# Altium PCB IPG_Rigid.PcbDoc (part 6 of 13)
Units mm, origin at the board's own origin, x right, y up, seen from the top; angles counter-clockwise.
Board outline 69.6 x 90.73 mm, 10 copper layers (TOP, DHOR, DVERT, GND 1, POWER, GND 2, GND 3, AVERT, AHOR, BOT), stack 1.198 mm thick; 745 components, 398 nets, 1997 pads, 2678 vias.
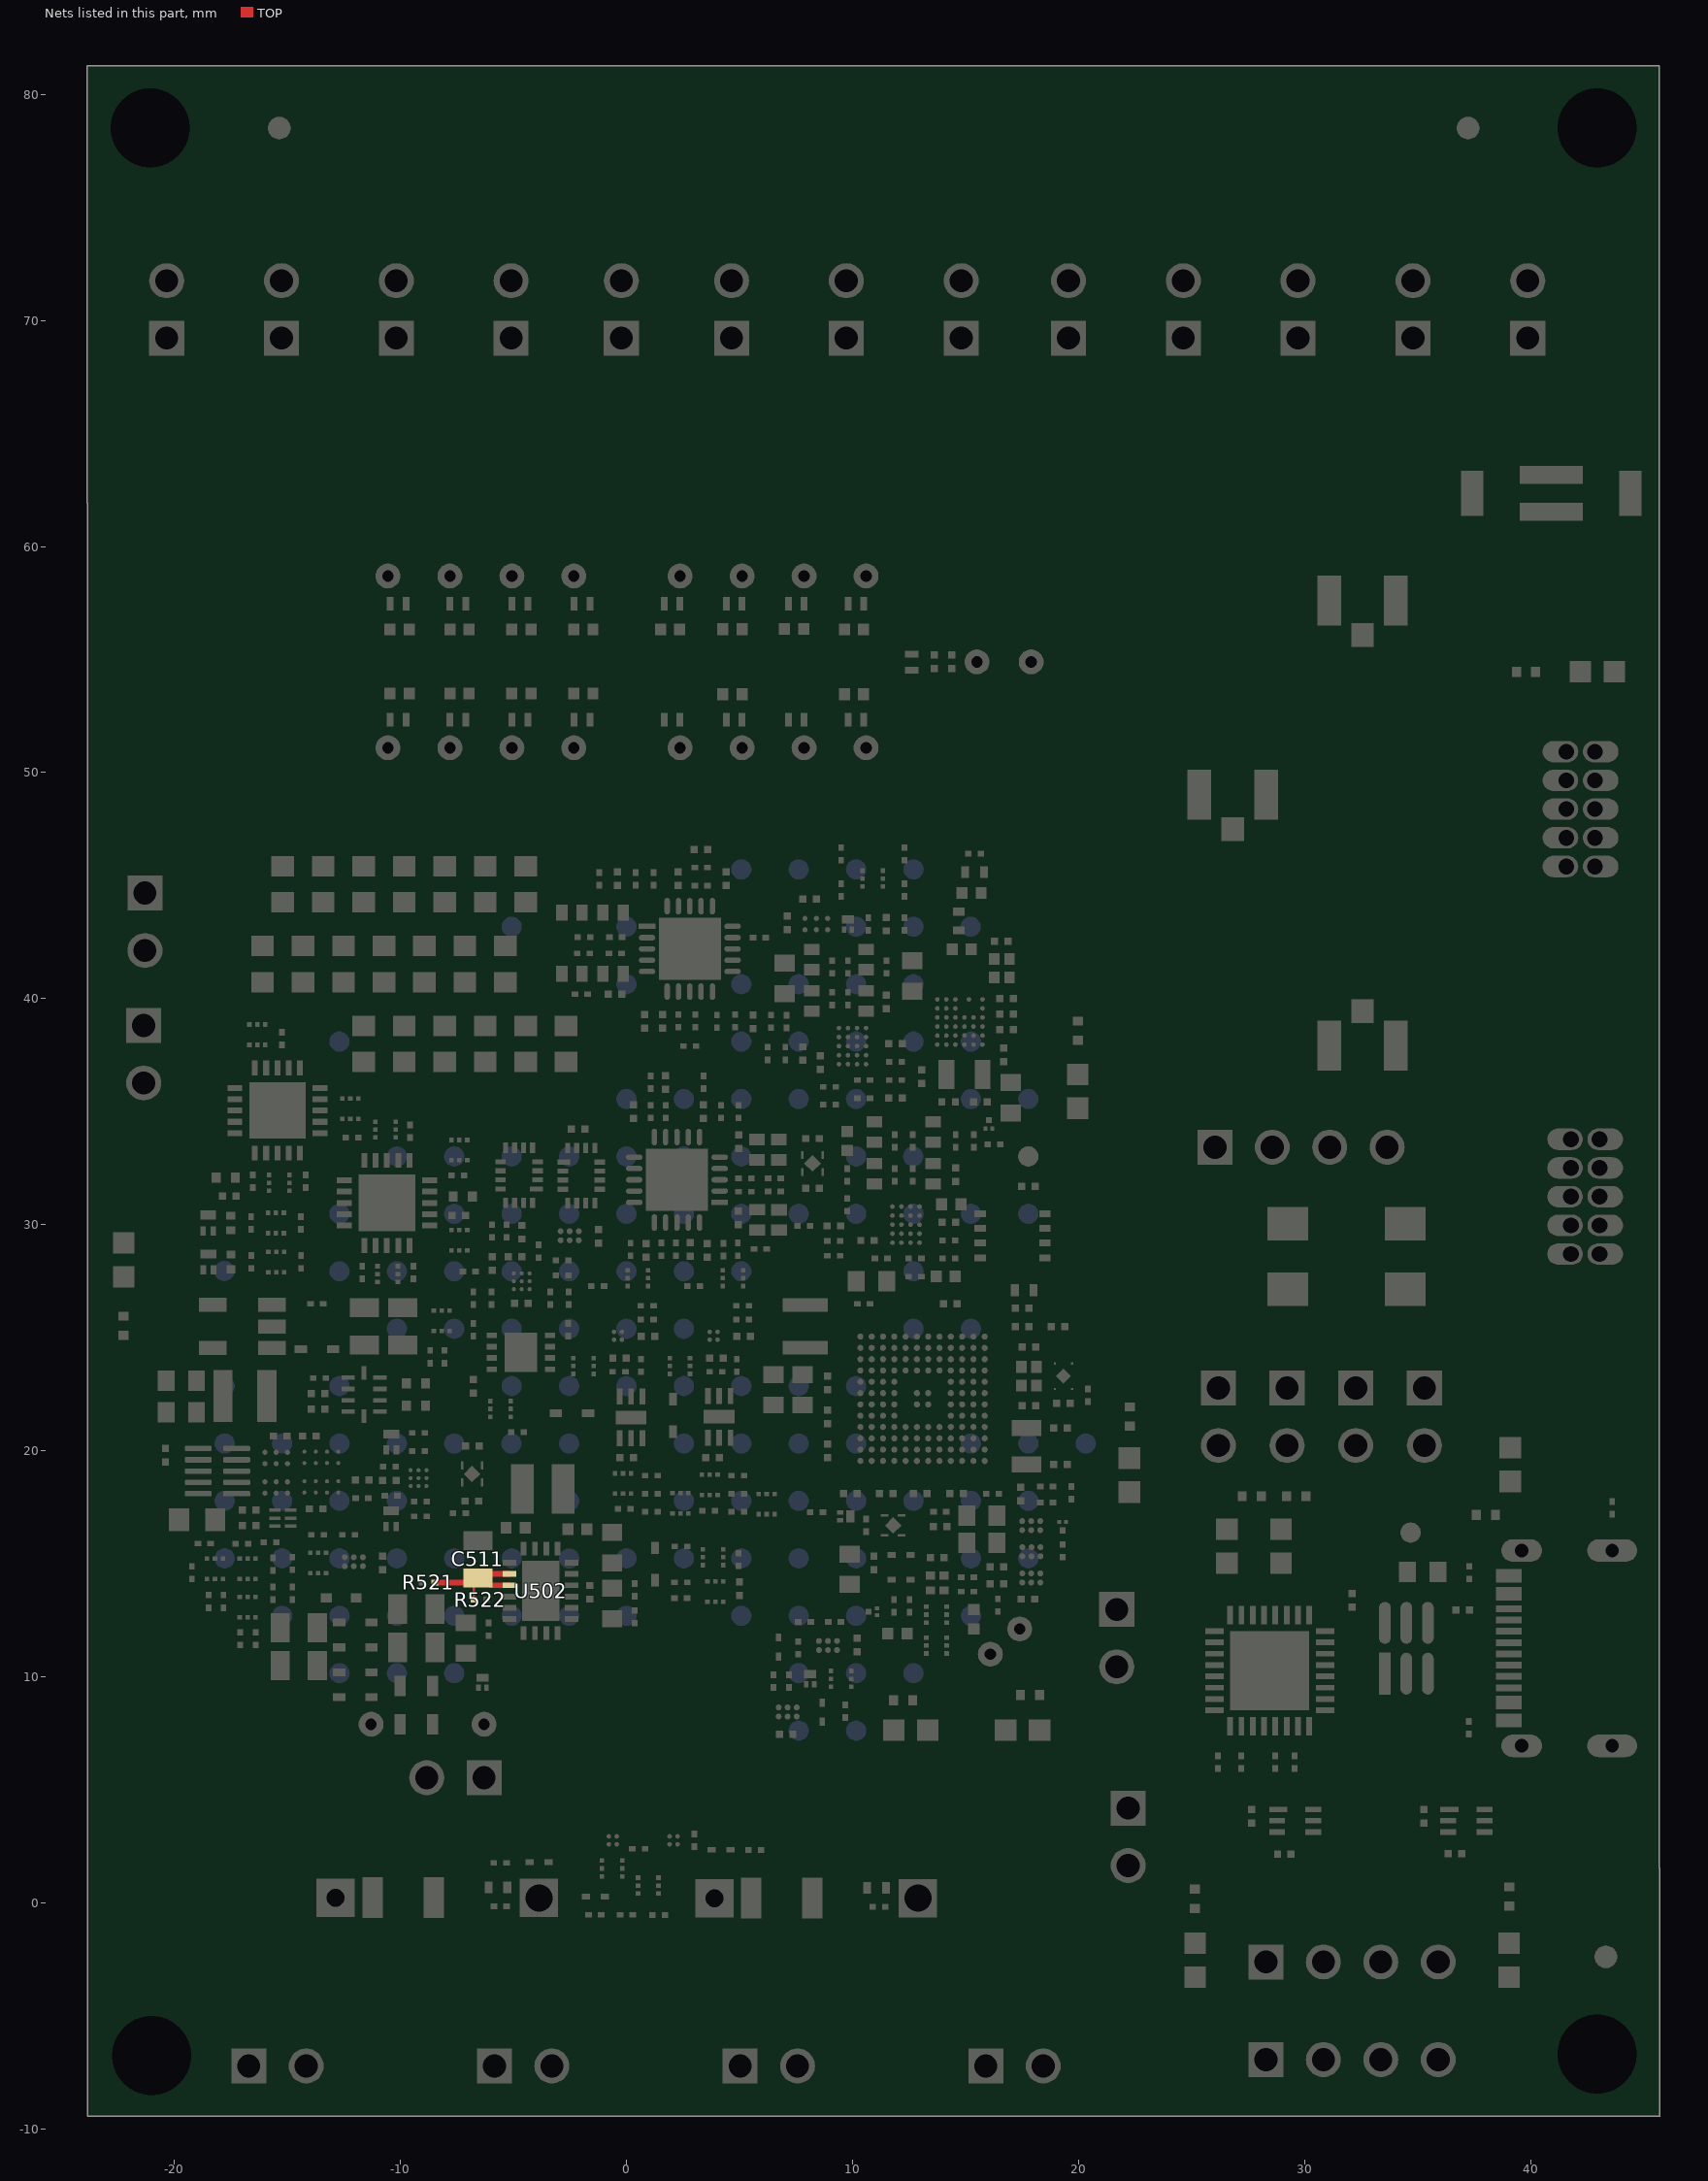
[diagram p11: the nets of this part, all layers, seen from the top]

## Part data (continued)
R913: "Fixed Resistor, Metal Glaze/thick Film, 0.05W, 120000ohm, 30V, 1% +/-Tol, 200ppm/Cel, Surface Mount, 0201", Case/Package=0201, Manufacturer="Vishay Dale", Max Operating Temperature=155°C, Medical Grade MFR=TBD, Min Operating Temperature=-55°C, Package Shape=Rectangular, Power=50mW, Rated Temperature=70°C, Resistor Type="FIXED RESISTOR", Supplier Part Number 1=541-CRCW0201120KFNEDDKR-ND, Temperature Coefficient=200ppm/°C, Tolerance=1%, Working Voltage=30V, Category="Chip SMD Resistors", ComponentLink1Description=https://datasheet.ciiva.com:443/pdfs/VipMasterIC/IC/VISH/VISH-S-A0002932828/VISH-S-A0002932828-1.pdf?src-supplier=IHS+Markit, ComponentLink1URL=https://datasheet.ciiva.com:443/pdfs/VipMasterIC/IC/VISH/VISH-S-A0002932828/VISH-S-A0002932828-1.pdf?src-supplier=IHS+Markit, ComponentLink2Description=https://datasheet.ciiva.com/7800/1719906-7800943.pdf?src-supplier=Element14, ComponentLink2URL=https://datasheet.ciiva.com/7800/1719906-7800943.pdf?src-supplier=Element14, ComponentLink3Description=https://datasheet.ciiva.com/22682/1700795-22682622.pdf?src-supplier=Element14, ComponentLink3URL=https://datasheet.ciiva.com/22682/1700795-22682622.pdf?src-supplier=Element14, ComponentLink4Description=https://datasheet.ciiva.com/22702/1719906-22702669.pdf?src-supplier=Element14, ComponentLink4URL=https://datasheet.ciiva.com/22702/1719906-22702669.pdf?src-supplier=Element14, ComponentLink5Description=https://datasheet.ciiva.com/29926/crcw0201e3-29926006.pdf?src-supplier=Avnet, ComponentLink5URL=https://datasheet.ciiva.com/29926/crcw0201e3-29926006.pdf?src-supplier=Avnet, Manufacturer Part Number=CRCW0201120KFNED, Medical Grade MFR PN=TBD, Mounting Technology="Surface Mount", Pins=2, Reach SVHC Compliant=Yes, RoHS=Yes, RoHS Compliant=Yes, Supplier 1=Digikey, Technology="METAL GLAZE/THICK FILM", Terminal Finish=Nickel, Termination=Wraparound
R1001 R1026 R1033 R1057: "Fixed Resistor, Metal Glaze/thick Film, 0.05W, 150000ohm, 30V, 1% +/-Tol, 200ppm/Cel, Surface Mount, 0201", Case/Package=0201, Manufacturer=Vishay, Max Operating Temperature=155°C, Medical Grade MFR=Mini-Systems, Medical Grade MFR PN=MWA96SM-1503F-NS62TR, Min Operating Temperature=-55°C, Package Height=0.23mm, Package Length=0.6mm, Package Shape=Rectangular, Package Style=SMTMeter, Package Width=0.3mm, Power=50mW, Rated Temperature=70°C, Resistor Type="FIXED RESISTOR", Supplier Part Number=541-CRCW0201150KFNEDCT-ND, Supplier Part Number 1=541-CRCW0201150KFNEDDKR-ND, Temperature Coefficient=200ppm/°C, Tolerance=1%, Working Voltage=30V, Category="Chip SMD Resistors", ComponentLink1Description=https://datasheet.ciiva.com:443/pdfs/VipMasterIC/IC/VISH/VISH-S-A0002932828/VISH-S-A0002932828-1.pdf?src-supplier=IHS+Markit, ComponentLink1URL=https://datasheet.ciiva.com:443/pdfs/VipMasterIC/IC/VISH/VISH-S-A0002932828/VISH-S-A0002932828-1.pdf?src-supplier=IHS+Markit, ComponentLink2Description=https://datasheet.ciiva.com/7673/1719906-7673181.pdf?src-supplier=Element14, ComponentLink2URL=https://datasheet.ciiva.com/7673/1719906-7673181.pdf?src-supplier=Element14, ComponentLink3Description=https://datasheet.ciiva.com/7673/1719906-7673182.pdf?src-supplier=Element14, ComponentLink3URL=https://datasheet.ciiva.com/7673/1719906-7673182.pdf?src-supplier=Element14, ComponentLink4Description=https://datasheet.ciiva.com/2577/crcw0201e3-2577323.pdf?src-supplier=Digikey, ComponentLink4URL=https://datasheet.ciiva.com/2577/crcw0201e3-2577323.pdf?src-supplier=Digikey, ComponentLink5Description=https://datasheet.ciiva.com/8968/crcw0201e3-8968685.pdf?src-supplier=Avnet, ComponentLink5URL=https://datasheet.ciiva.com/8968/crcw0201e3-8968685.pdf?src-supplier=Avnet, ComponentLink6Description=https://datasheet.ciiva.com/22692/1719906-22692733.pdf?src-supplier=Element14, ComponentLink6URL=https://datasheet.ciiva.com/22692/1719906-22692733.pdf?src-supplier=Element14, Construction=Chip, JESD-609 Code=e3, Manufacturer Part Number=CRCW0201150KFNED, Mounting Technology="Surface Mount", Packaging="Tape and Reel", Pins=2, Pricing="1=0,1, 10=0,037, 50=0,0242, 100=0,0204, 500=0,01426, 1000=0,01241, 5000=0,00924 (USD)", Reach SVHC Compliant=Yes, Reference Standard=AEC-Q200, RoHS=Yes, RoHS Compliant=Yes, Stock=35009, Supplier=Digikey, Supplier 1=Digikey, Technology="METAL GLAZE/THICK FILM", Terminal Finish=Nickel, Termination=Wraparound
R1005 R1006 R1036: "Fixed Resistor, Metal Glaze/thick Film, 0.05W, 1400000ohm, 30V, 1% +/-Tol, 200ppm/Cel, Surface Mount, 0201", Case/Package=0201, Manufacturer="Vishay Draloric", Max Operating Temperature=155°C, Medical Grade MFR=Mini-Systems, Medical Grade MFR PN=MWA96SM-1404F-NS62TR, Min Operating Temperature=-55°C, Package Shape=Rectangular, Power=50mW, Rated Temperature=70°C, Resistor Type="FIXED RESISTOR", Supplier Part Number=541-CRCW02011M40FNEDCT-ND, Temperature Coefficient=200ppm/°C, Tolerance=1%, Working Voltage=30V, Category="Chip SMD Resistors", ComponentLink1Description=https://datasheet.ciiva.com:443/pdfs/VipMasterIC/IC/VISH/VISH-S-A0002932828/VISH-S-A0002932828-1.pdf?src-supplier=IHS+Markit, ComponentLink1URL=https://datasheet.ciiva.com:443/pdfs/VipMasterIC/IC/VISH/VISH-S-A0002932828/VISH-S-A0002932828-1.pdf?src-supplier=IHS+Markit, ComponentLink2Description=http://www.farnell.com/datasheets/2111203.pdf?src-supplier=Farnell, ComponentLink2URL=http://www.farnell.com/datasheets/2111203.pdf?src-supplier=Farnell, ComponentLink3Description=http://www.farnell.com/datasheets/2238160.pdf?src-supplier=Farnell, ComponentLink3URL=http://www.farnell.com/datasheets/2238160.pdf?src-supplier=Farnell, ComponentLink4Description=http://www.farnell.com/datasheets/2111203.pdf?src-supplier=Element14, ComponentLink4URL=http://www.farnell.com/datasheets/2111203.pdf?src-supplier=Element14, ComponentLink5Description=http://www.farnell.com/datasheets/2045973.pdf?src-supplier=Element14, ComponentLink5URL=http://www.farnell.com/datasheets/2045973.pdf?src-supplier=Element14, ComponentLink6Description=http://www.farnell.com/datasheets/1719906.pdf?src-supplier=Element14, ComponentLink6URL=http://www.farnell.com/datasheets/1719906.pdf?src-supplier=Element14, ComponentLink7Description=http://www.vishay.com/docs/20052/crcw0201e3.pdf?src-supplier=Digikey, ComponentLink7URL=http://www.vishay.com/docs/20052/crcw0201e3.pdf?src-supplier=Digikey, JESD-609 Code=e3, Manufacturer Part Number=CRCW02011M40FNED, Mounting Technology="Surface Mount", Packaging="Tape and Reel", Pins=2, Pricing="1=0,1, 10=0,037, 50=0,0242, 100=0,0204, 500=0,01426, 1000=0,01241, 5000=0,00924 (USD)", Reach SVHC Compliant=Yes, RoHS=Yes, RoHS Compliant=Yes, Stock=24065, Supplier=Digikey, Supplier 1=Digikey, Supplier Part Number 1=541-CRCW02011M40FNEDCT-ND, Technology="METAL GLAZE/THICK FILM", Terminal Finish=Nickel, Termination=Wraparound
R1011 R1012 R1015 R1018 R1042 R1043 R1046 R1047: "Fixed Resistor, Metal Glaze/thick Film, 0.05W, 180000ohm, 30V, 1% +/-Tol, 200ppm/Cel, Surface Mount, 0201", Case/Package=0201, Manufacturer=Vishay, Max Operating Temperature=155°C, Medical Grade MFR=Mini-Systems, Medical Grade MFR PN=MWA96SM-1803F-NS62TR, Min Operating Temperature=-55°C, Package Height=0.23mm, Package Length=0.6mm, Package Shape=Rectangular, Package Style=SMTMeter, Package Width=0.3mm, Power=50mW, Rated Temperature=70°C, Resistor Type="FIXED RESISTOR", Supplier Part Number=541-CRCW0201180KFNEDCT-ND, Temperature Coefficient=200ppm/°C, Tolerance=1%, Working Voltage=30V, Category="Chip SMD Resistors", ComponentLink1Description=https://datasheet.ciiva.com:443/pdfs/VipMasterIC/IC/VISH/VISH-S-A0002932828/VISH-S-A0002932828-1.pdf?src-supplier=IHS+Markit, ComponentLink1URL=https://datasheet.ciiva.com:443/pdfs/VipMasterIC/IC/VISH/VISH-S-A0002932828/VISH-S-A0002932828-1.pdf?src-supplier=IHS+Markit, ComponentLink2Description=https://datasheet.ciiva.com/7714/1719906-7714127.pdf?src-supplier=Element14, ComponentLink2URL=https://datasheet.ciiva.com/7714/1719906-7714127.pdf?src-supplier=Element14, ComponentLink3Description=https://datasheet.ciiva.com/22665/1700795-22665798.pdf?src-supplier=Element14, ComponentLink3URL=https://datasheet.ciiva.com/22665/1700795-22665798.pdf?src-supplier=Element14, ComponentLink4Description=https://datasheet.ciiva.com/22692/1719906-22692745.pdf?src-supplier=Element14, ComponentLink4URL=https://datasheet.ciiva.com/22692/1719906-22692745.pdf?src-supplier=Element14, Construction=Chip, JESD-609 Code=e3, Manufacturer Part Number=CRCW0201180KFNED, Mounting Technology="Surface Mount", Packaging="Tape and Reel", Pins=2, Pricing="1=0,1, 10=0,037, 50=0,0242, 100=0,0204, 500=0,01426, 1000=0,01241, 5000=0,00924 (USD)", Reach SVHC Compliant=Yes, Reference Standard=AEC-Q200, RoHS=Yes, RoHS Compliant=Yes, Stock=52185, Supplier=Digikey, Supplier 1=Digikey, Supplier Part Number 1=541-CRCW0201180KFNEDCT-ND, Technology="METAL GLAZE/THICK FILM", Terminal Finish=Nickel, Termination=Wraparound
R1021 R1022 R1052 R1053: "Fixed Resistor, Metal Glaze/thick Film, 0.05W, 360000ohm, 30V, 1% +/-Tol, 200ppm/Cel, Surface Mount, 0201", Case/Package=0201, Manufacturer=Vishay, Max Operating Temperature=155°C, Medical Grade MFR=TBD, Min Operating Temperature=-55°C, Package Height=0.23mm, Package Length=0.6mm, Package Shape=Rectangular, Package Style=SMTMeter, Package Width=0.3mm, Power=50mW, Rated Temperature=70°C, Resistor Type="FIXED RESISTOR", Supplier Part Number=541-CRCW0201360KFNEDCT-ND, Temperature Coefficient=200ppm/°C, Tolerance=1%, Working Voltage=30V, Category="Chip SMD Resistors", ComponentLink1Description=https://datasheet.ciiva.com:443/pdfs/VipMasterIC/IC/VISH/VISH-S-A0002932828/VISH-S-A0002932828-1.pdf?src-supplier=IHS+Markit, ComponentLink1URL=https://datasheet.ciiva.com:443/pdfs/VipMasterIC/IC/VISH/VISH-S-A0002932828/VISH-S-A0002932828-1.pdf?src-supplier=IHS+Markit, ComponentLink2Description=https://datasheet.ciiva.com/2577/crcw0201e3-2577346.pdf?src-supplier=Digikey, ComponentLink2URL=https://datasheet.ciiva.com/2577/crcw0201e3-2577346.pdf?src-supplier=Digikey, ComponentLink3Description=https://datasheet.ciiva.com/8943/crcw0201e3-8943180.pdf?src-supplier=Avnet, ComponentLink3URL=https://datasheet.ciiva.com/8943/crcw0201e3-8943180.pdf?src-supplier=Avnet, ComponentLink4Description=https://datasheet.ciiva.com/22674/1700795-22674747.pdf?src-supplier=Element14, ComponentLink4URL=https://datasheet.ciiva.com/22674/1700795-22674747.pdf?src-supplier=Element14, ComponentLink5Description=https://datasheet.ciiva.com/22706/1719906-22706189.pdf?src-supplier=Element14, ComponentLink5URL=https://datasheet.ciiva.com/22706/1719906-22706189.pdf?src-supplier=Element14, ComponentLink6Description=https://datasheet.ciiva.com/7673/1719906-7673964.pdf?src-supplier=Element14, ComponentLink6URL=https://datasheet.ciiva.com/7673/1719906-7673964.pdf?src-supplier=Element14, ComponentLink7Description=https://datasheet.ciiva.com/7673/1719906-7673965.pdf?src-supplier=Element14, ComponentLink7URL=https://datasheet.ciiva.com/7673/1719906-7673965.pdf?src-supplier=Element14, Construction=Chip, JESD-609 Code=e3, Manufacturer Part Number=CRCW0201360KFNED, Medical Grade MFR PN=TBD, Mounting Technology="Surface Mount", Packaging="Tape and Reel", Pins=2, Pricing="1=0,1, 10=0,037, 50=0,0242, 100=0,0204, 500=0,01426, 1000=0,01241, 5000=0,00924 (USD)", Reach SVHC Compliant=Yes, Reference Standard=AEC-Q200, RoHS=Yes, RoHS Compliant=Yes, Stock=14607, Supplier=Digikey, Supplier 1=Digikey, Supplier Part Number 1=541-CRCW0201360KFNEDCT-ND, Technology="METAL GLAZE/THICK FILM", Terminal Finish=Nickel, Termination=Wraparound
R1023: "Fixed Resistor, Metal Glaze/thick Film, 0.05W, 2200000ohm, 30V, 1% +/-Tol, 200ppm/Cel, Surface Mount, 0201", Case/Package=0201, Manufacturer="Vishay Draloric", Max Operating Temperature=155°C, Medical Grade MFR=TBD, Min Operating Temperature=-55°C, Package Shape=Rectangular, Power=50mW, Rated Temperature=70°C, Resistor Type="FIXED RESISTOR", Supplier Part Number=541-CRCW02012M20FNEDCT-ND, Temperature Coefficient=200ppm/°C, Tolerance=1%, Working Voltage=30V, Category="Chip SMD Resistors", ComponentLink1Description=https://datasheet.ciiva.com:443/pdfs/VipMasterIC/IC/VISH/VISH-S-A0002932828/VISH-S-A0002932828-1.pdf?src-supplier=IHS+Markit, ComponentLink1URL=https://datasheet.ciiva.com:443/pdfs/VipMasterIC/IC/VISH/VISH-S-A0002932828/VISH-S-A0002932828-1.pdf?src-supplier=IHS+Markit, ComponentLink2Description=https://datasheet.ciiva.com/7800/1719906-7800943.pdf?src-supplier=Element14, ComponentLink2URL=https://datasheet.ciiva.com/7800/1719906-7800943.pdf?src-supplier=Element14, ComponentLink3Description=https://datasheet.ciiva.com/22682/1700795-22682622.pdf?src-supplier=Element14, ComponentLink3URL=https://datasheet.ciiva.com/22682/1700795-22682622.pdf?src-supplier=Element14, ComponentLink4Description=https://datasheet.ciiva.com/22702/1719906-22702669.pdf?src-supplier=Element14, ComponentLink4URL=https://datasheet.ciiva.com/22702/1719906-22702669.pdf?src-supplier=Element14, ComponentLink5Description=https://datasheet.ciiva.com/29926/crcw0201e3-29926006.pdf?src-supplier=Avnet, ComponentLink5URL=https://datasheet.ciiva.com/29926/crcw0201e3-29926006.pdf?src-supplier=Avnet, JESD-609 Code=e3, Manufacturer Part Number=CRCW02012M20FNED, Medical Grade MFR PN=TBD, Mounting Technology="Surface Mount", Packaging="Tape and Reel", Pins=2, Pricing="1=0,1, 10=0,037, 50=0,0242, 100=0,0204, 500=0,01426, 1000=0,01241, 5000=0,00924 (USD)", Reach SVHC Compliant=Yes, RoHS=Yes, RoHS Compliant=Yes, Stock=17414, Supplier=Digikey, Supplier 1=Digikey, Supplier Part Number 1=541-CRCW02012M20FNEDCT-ND, Technology="METAL GLAZE/THICK FILM", Terminal Finish=Nickel, Termination=Wraparound
R1029 R1060: "Fixed Resistor, Metal Glaze/thick Film, 0.05W, 249000ohm, 30V, 1% +/-Tol, 200ppm/Cel, Surface Mount, 0201", Case/Package=0201, Manufacturer=Vishay, Max Operating Temperature=155°C, Medical Grade MFR=Mini-Systems, Medical Grade MFR PN=MWA96SM-2493F-NS62TR, Min Operating Temperature=-55°C, Package Height=0.23mm, Package Length=0.6mm, Package Shape=Rectangular, Package Style=SMTMeter, Package Width=0.3mm, Power=50mW, Rated Temperature=70°C, Resistor Type="FIXED RESISTOR", Supplier Part Number=541-CRCW0201249KFNEDCT-ND, Temperature Coefficient=200ppm/°C, Tolerance=1%, Working Voltage=30V, Category="Chip SMD Resistors", ComponentLink1Description=https://datasheet.ciiva.com:443/pdfs/VipMasterIC/IC/VISH/VISH-S-A0002932828/VISH-S-A0002932828-1.pdf?src-supplier=IHS+Markit, ComponentLink1URL=https://datasheet.ciiva.com:443/pdfs/VipMasterIC/IC/VISH/VISH-S-A0002932828/VISH-S-A0002932828-1.pdf?src-supplier=IHS+Markit, ComponentLink2Description=https://datasheet.ciiva.com/8953/crcw0201e3-8953881.pdf?src-supplier=Avnet, ComponentLink2URL=https://datasheet.ciiva.com/8953/crcw0201e3-8953881.pdf?src-supplier=Avnet, Construction=Chip, JESD-609 Code=e3, Manufacturer Part Number=CRCW0201249KFNED, Mounting Technology="Surface Mount", Packaging="Tape and Reel", Pins=2, Pricing="1=0,1, 10=0,037, 50=0,0242, 100=0,0204, 500=0,01426, 1000=0,01241, 5000=0,00924 (USD)", Reach SVHC Compliant=Yes, Reference Standard=AEC-Q200, RoHS=Yes, RoHS Compliant=Yes, Stock=82297, Supplier=Digikey, Supplier 1=Digikey, Supplier Part Number 1=541-CRCW0201249KFNEDCT-ND, Technology="METAL GLAZE/THICK FILM", Terminal Finish=Nickel, Termination=Wraparound
R1030 R1061: "Fixed Resistor, Metal Glaze/thick Film, 0.05W, 910000ohm, 30V, 1% +/-Tol, 200ppm/Cel, Surface Mount, 0201", Case/Package=0201, Manufacturer="Vishay Draloric", Max Operating Temperature=155°C, Medical Grade MFR=TBD, Min Operating Temperature=-55°C, Package Shape=Rectangular, Power=50mW, Rated Temperature=70°C, Resistor Type="FIXED RESISTOR", Supplier Part Number=541-CRCW02016M80FNEDCT-ND, Supplier Part Number 1=541-CRCW0201910KFNEDDKR-ND, Temperature Coefficient=200ppm/°C, Tolerance=1%, Working Voltage=30V, Category="Chip SMD Resistors", ComponentLink1Description=https://datasheet.ciiva.com:443/pdfs/VipMasterIC/IC/VISH/VISH-S-A0002932828/VISH-S-A0002932828-1.pdf?src-supplier=IHS+Markit, ComponentLink1URL=https://datasheet.ciiva.com:443/pdfs/VipMasterIC/IC/VISH/VISH-S-A0002932828/VISH-S-A0002932828-1.pdf?src-supplier=IHS+Markit, ComponentLink2Description=https://datasheet.ciiva.com/22682/1700795-22682637.pdf?src-supplier=Element14, ComponentLink2URL=https://datasheet.ciiva.com/22682/1700795-22682637.pdf?src-supplier=Element14, JESD-609 Code=e3, Manufacturer Part Number=CRCW0201910KFNED, Medical Grade MFR PN=TBD, Mounting Technology="Surface Mount", Packaging="Tape and Reel", Pins=2, Pricing="1=0,1, 10=0,037, 50=0,0242, 100=0,0204, 500=0,01426, 1000=0,01241, 5000=0,00924 (USD)", Reach SVHC Compliant=Yes, RoHS=Yes, RoHS Compliant=Yes, Stock=8955, Supplier=Digikey, Supplier 1=Digikey, Technology="METAL GLAZE/THICK FILM", Terminal Finish=Nickel, Termination=Wraparound
R1054 R1055: "Resistor, 1.8M, 1%, 0201", Manufacturer=Yageo, Medical Grade MFR=TBD, Rating=25V, Supplier Part Number 1=13-RC0201FR-071M8LCT-ND, Category=Resistor, Length (mm)=0.6, Manufacturer Part Number=RC0201FR-071M8L, Medical Grade MFR PN=TBD, PCB Footprint=R0201_C, Precision=1%, Supplier 1=Digikey, Supplier 2=Digikey, Supplier 3=Digikey, Supplier 4=Mouser, Supplier Part Number 2=13-RC0201FR-071M8LDKR-ND, Supplier Part Number 3=13-RC0201FR-071M8LTR-ND, Supplier Part Number 4=603-RC0201FR-071M8L, Thickness (mm)=0.23, Width (mm)=0.3
R1102 R1104 R1401 R1402 R1404 R1406: "Fixed Resistor, Metal Glaze/thick Film, 0.05W, 1000ohm, 30V, 1% +/-Tol, 200ppm/Cel, Surface Mount, 0201", Case/Package=0201, Manufacturer=Vishay, Max Operating Temperature=155°C, Medical Grade MFR=Mini-Systems, Medical Grade MFR PN=MWA96SM-1001F-NS62TR, Min Operating Temperature=-55°C, Package Height=0.23mm, Package Length=0.6mm, Package Shape=Rectangular, Package Style=SMTMeter, Package Width=0.3mm, Power=50mW, Rated Temperature=70°C, Resistor Type="FIXED RESISTOR", Supplier Part Number=541-1.00KABCT-ND, Temperature Coefficient=200ppm/°C, Tolerance=1%, Working Voltage=30V, Category="Chip SMD Resistors", ComponentLink1Description=https://datasheet.ciiva.com:443/pdfs/VipMasterIC/IC/VISH/VISH-S-A0002932828/VISH-S-A0002932828-1.pdf?src-supplier=IHS+Markit, ComponentLink1URL=https://datasheet.ciiva.com:443/pdfs/VipMasterIC/IC/VISH/VISH-S-A0002932828/VISH-S-A0002932828-1.pdf?src-supplier=IHS+Markit, ComponentLink2Description=https://datasheet.ciiva.com/7983/1719906-7983324.pdf?src-supplier=Element14, ComponentLink2URL=https://datasheet.ciiva.com/7983/1719906-7983324.pdf?src-supplier=Element14, ComponentLink3Description=https://datasheet.ciiva.com/7983/1719906-7983323.pdf?src-supplier=Element14, ComponentLink3URL=https://datasheet.ciiva.com/7983/1719906-7983323.pdf?src-supplier=Element14, ComponentLink4Description=https://datasheet.ciiva.com/22692/1719906-22692751.pdf?src-supplier=Element14, ComponentLink4URL=https://datasheet.ciiva.com/22692/1719906-22692751.pdf?src-supplier=Element14, ComponentLink5Description=https://datasheet.ciiva.com/22665/1825492-22665818.pdf?src-supplier=Element14, ComponentLink5URL=https://datasheet.ciiva.com/22665/1825492-22665818.pdf?src-supplier=Element14, ComponentLink6Description=https://datasheet.ciiva.com/2474/crcw0201e3-2474801.pdf?src-supplier=Digikey, ComponentLink6URL=https://datasheet.ciiva.com/2474/crcw0201e3-2474801.pdf?src-supplier=Digikey, ComponentLink7Description=https://datasheet.ciiva.com/2474/crcw0201e3-2474802.pdf?src-supplier=Digikey, ComponentLink7URL=https://datasheet.ciiva.com/2474/crcw0201e3-2474802.pdf?src-supplier=Digikey, ComponentLink8Description=https://datasheet.ciiva.com/2474/crcw0201e3-2474800.pdf?src-supplier=Digikey, ComponentLink8URL=https://datasheet.ciiva.com/2474/crcw0201e3-2474800.pdf?src-supplier=Digikey, ComponentLink9Description=https://datasheet.ciiva.com/22871/70202042-22871422.pdf?src-supplier=Allied+Electronics, ComponentLink9URL=https://datasheet.ciiva.com/22871/70202042-22871422.pdf?src-supplier=Allied+Electronics, ComponentLink10Description=https://datasheet.ciiva.com/3255/crcw0201e3-3255929.pdf?src-supplier=Avnet, ComponentLink10URL=https://datasheet.ciiva.com/3255/crcw0201e3-3255929.pdf?src-supplier=Avnet, Construction=Chip, JESD-609 Code=e3, Manufacturer Part Number=CRCW02011K00FNED, Mounting Technology="Surface Mount", Packaging="Tape and Reel", Pins=2, Pricing="1=0,1, 10=0,037, 50=0,0242, 100=0,0204, 500=0,01426, 1000=0,01241, 5000=0,00924 (USD)", Reach SVHC Compliant=Yes, Reference Standard=AEC-Q200, RoHS=Yes, RoHS Compliant=Yes, Stock=303224, Supplier=Digikey, Supplier 1="Arrow Electronics", Supplier Part Number 1=CRCW02011K00FNED, Technology="METAL GLAZE/THICK FILM", Terminal Finish=Nickel, Termination=Wraparound
R1103 R1105: "Fixed Resistor, Metal Glaze/thick Film, 0.05W, 150ohm, 30V, 1% +/-Tol, 200ppm/Cel, Surface Mount, 0201", Case/Package=0201, Manufacturer=Vishay, Max Operating Temperature=155°C, Medical Grade MFR=Mini-Systems, Medical Grade MFR PN=MWA96SM-1500F-NS62TR, Min Operating Temperature=-55°C, Package Height=0.23mm, Package Length=0.6mm, Package Shape=Rectangular, Package Style=SMTMeter, Package Width=0.3mm, Power=50mW, Rated Temperature=70°C, Resistor Type="FIXED RESISTOR", Supplier Part Number=541-CRCW0201150RFNEDCT-ND, Temperature Coefficient=200ppm/°C, Tolerance=1%, Working Voltage=30V, Category="Chip SMD Resistors", ComponentLink1Description=https://datasheet.ciiva.com:443/pdfs/VipMasterIC/IC/VISH/VISH-S-A0002932828/VISH-S-A0002932828-1.pdf?src-supplier=IHS+Markit, ComponentLink1URL=https://datasheet.ciiva.com:443/pdfs/VipMasterIC/IC/VISH/VISH-S-A0002932828/VISH-S-A0002932828-1.pdf?src-supplier=IHS+Markit, ComponentLink2Description=https://datasheet.ciiva.com/2577/crcw0201e3-2577126.pdf?src-supplier=Digikey, ComponentLink2URL=https://datasheet.ciiva.com/2577/crcw0201e3-2577126.pdf?src-supplier=Digikey, ComponentLink3Description=https://datasheet.ciiva.com/8969/crcw0201e3-8969797.pdf?src-supplier=Avnet, ComponentLink3URL=https://datasheet.ciiva.com/8969/crcw0201e3-8969797.pdf?src-supplier=Avnet, ComponentLink4Description=https://datasheet.ciiva.com/7777/1719906-7777159.pdf?src-supplier=Element14, ComponentLink4URL=https://datasheet.ciiva.com/7777/1719906-7777159.pdf?src-supplier=Element14, ComponentLink5Description=https://datasheet.ciiva.com/7777/1719906-7777160.pdf?src-supplier=Element14, ComponentLink5URL=https://datasheet.ciiva.com/7777/1719906-7777160.pdf?src-supplier=Element14, Construction=Chip, JESD-609 Code=e3, Manufacturer Part Number=CRCW0201150RFNED, Mounting Technology="Surface Mount", Packaging="Tape and Reel", Pins=2, Pricing="1=0,1, 10=0,037, 50=0,0242, 100=0,0204, 500=0,01426, 1000=0,01241, 5000=0,00924 (USD)", Reach SVHC Compliant=Yes, Reference Standard=AEC-Q200, RoHS=Yes, RoHS Compliant=Yes, Stock=19000, Supplier=Digikey, Supplier 1=Digikey, Supplier Part Number 1=541-CRCW0201150RFNEDCT-ND, Technology="METAL GLAZE/THICK FILM", Terminal Finish=Nickel, Termination=Wraparound
R1150 R1153: "Fixed Resistor, Metal Glaze/thick Film, 0.05W, 2800ohm, 30V, 1% +/-Tol, 200ppm/Cel, Surface Mount, 0201", Case/Package=0201, Manufacturer=Vishay, Max Operating Temperature=155°C, Medical Grade MFR=Mini-Systems, Medical Grade MFR PN=MWA96SM-2801F-NS62TR, Min Operating Temperature=-55°C, Package Height=0.23mm, Package Length=0.6mm, Package Shape=Rectangular, Package Style=SMTMeter, Package Width=0.3mm, Power=50mW, Rated Temperature=70°C, Resistor Type="FIXED RESISTOR", Supplier Part Number=541-CRCW02012K80FNEDCT-ND, Temperature Coefficient=200ppm/°C, Tolerance=1%, Working Voltage=30V, Category="Chip SMD Resistors", ComponentLink1Description=https://datasheet.ciiva.com:443/pdfs/VipMasterIC/IC/VISH/VISH-S-A0002932828/VISH-S-A0002932828-1.pdf?src-supplier=IHS+Markit, ComponentLink1URL=https://datasheet.ciiva.com:443/pdfs/VipMasterIC/IC/VISH/VISH-S-A0002932828/VISH-S-A0002932828-1.pdf?src-supplier=IHS+Markit, ComponentLink2Description=https://datasheet.ciiva.com/5915/1719906-5915662.pdf?src-supplier=Farnell, ComponentLink2URL=https://datasheet.ciiva.com/5915/1719906-5915662.pdf?src-supplier=Farnell, ComponentLink3Description=https://datasheet.ciiva.com/5915/1719906-5915663.pdf?src-supplier=Farnell, ComponentLink3URL=https://datasheet.ciiva.com/5915/1719906-5915663.pdf?src-supplier=Farnell, ComponentLink4Description=https://datasheet.ciiva.com/7690/1719906-7690602.pdf?src-supplier=Element14, ComponentLink4URL=https://datasheet.ciiva.com/7690/1719906-7690602.pdf?src-supplier=Element14, ComponentLink5Description=https://datasheet.ciiva.com/7690/1719906-7690603.pdf?src-supplier=Element14, ComponentLink5URL=https://datasheet.ciiva.com/7690/1719906-7690603.pdf?src-supplier=Element14, ComponentLink6Description=https://datasheet.ciiva.com/22700/1719906-22700665.pdf?src-supplier=Element14, ComponentLink6URL=https://datasheet.ciiva.com/22700/1719906-22700665.pdf?src-supplier=Element14, Construction=Chip, JESD-609 Code=e3, Manufacturer Part Number=CRCW02012K80FNED, Mounting Technology="Surface Mount", Packaging="Tape and Reel", Pins=2, Pricing="1=0,1, 10=0,037, 50=0,0242, 100=0,0204, 500=0,01426, 1000=0,01241, 5000=0,00924 (USD)", Reach SVHC Compliant=Yes, Reference Standard=AEC-Q200, RoHS=Yes, RoHS Compliant=Yes, Stock=8141, Supplier=Digikey, Supplier 1=Digikey, Supplier Part Number 1=541-CRCW02012K80FNEDCT-ND, Technology="METAL GLAZE/THICK FILM", Terminal Finish=Nickel, Termination=Wraparound
R1302 R1303 R1304: library part CRCW02016K80FNED, "Fixed Resistor, Metal Glaze/thick Film, 0.05W, 0ohm, Surface Mount, 0201", Case/Package=0201, Manufacturer=Vishay, Max Operating Temperature=155°C, Medical Grade MFR=Mini-Systems, Medical Grade MFR PN=MWA96SM-6801F-NS62TR, Min Operating Temperature=-55°C, Package Height=0.23mm, Package Length=0.6mm, Package Shape=Rectangular, Package Style=SMTMeter, Package Width=0.3mm, Power=50mW, Rated Temperature=70°C, Resistor Type="FIXED RESISTOR", Supplier Part Number=541-CRCW02016K80FNEDCT-ND, Temperature Coefficient=200ppm/°C, Tolerance=1%, Working Voltage=30V, Category="Chip SMD Resistors", ComponentLink1Description=https://datasheet.ciiva.com:443/pdfs/VipMasterIC/IC/VISH/VISH-S-A0002932828/VISH-S-A0002932828-1.pdf?src-supplier=IHS+Markit, ComponentLink1URL=https://datasheet.ciiva.com:443/pdfs/VipMasterIC/IC/VISH/VISH-S-A0002932828/VISH-S-A0002932828-1.pdf?src-supplier=IHS+Markit, ComponentLink2Description=https://datasheet.ciiva.com/2577/crcw0201e3-2577241.pdf?src-supplier=Digikey, ComponentLink2URL=https://datasheet.ciiva.com/2577/crcw0201e3-2577241.pdf?src-supplier=Digikey, ComponentLink3Description=https://datasheet.ciiva.com/9060/crcw0201e3-9060860.pdf?src-supplier=Avnet, ComponentLink3URL=https://datasheet.ciiva.com/9060/crcw0201e3-9060860.pdf?src-supplier=Avnet, ComponentLink4Description=https://datasheet.ciiva.com/22674/1700795-22674684.pdf?src-supplier=Element14, ComponentLink4URL=https://datasheet.ciiva.com/22674/1700795-22674684.pdf?src-supplier=Element14, ComponentLink5Description=https://datasheet.ciiva.com/22700/1719906-22700351.pdf?src-supplier=Element14, ComponentLink5URL=https://datasheet.ciiva.com/22700/1719906-22700351.pdf?src-supplier=Element14, ComponentLink6Description=https://datasheet.ciiva.com/7672/1719906-7672744.pdf?src-supplier=Element14, ComponentLink6URL=https://datasheet.ciiva.com/7672/1719906-7672744.pdf?src-supplier=Element14, ComponentLink7Description=https://datasheet.ciiva.com/7672/1719906-7672745.pdf?src-supplier=Element14, ComponentLink7URL=https://datasheet.ciiva.com/7672/1719906-7672745.pdf?src-supplier=Element14, Construction=Chip, JESD-609 Code=e3, Manufacturer Part Number=CRCW02016K80FNED, Mounting Technology="Surface Mount", Packaging="Tape and Reel", Pins=2, Pricing="1=0,1, 10=0,037, 50=0,0242, 100=0,0204, 500=0,01426, 1000=0,01241, 5000=0,00924 (USD)", Reach SVHC Compliant=Yes, Reference Standard=AEC-Q200, RoHS=Yes, RoHS Compliant=Yes, Stock=40938, Supplier=Digikey, Supplier 1=Digikey, Supplier Part Number 1=541-CRCW02016K80FNEDCT-ND, Technology="METAL GLAZE/THICK FILM", Terminal Finish=Nickel, Termination=Wraparound
R1405 R1409: "Fixed Resistor, Metal Glaze/thick Film, 0.05W, 5110ohm, 30V, 1% +/-Tol, 200ppm/Cel, Surface Mount, 0201", Case/Package=0201, Manufacturer=Vishay, Max Operating Temperature=155°C, Medical Grade MFR=Mini-Systems, Medical Grade MFR PN=MWA96SM-5111F-NS62TR, Min Operating Temperature=-55°C, Package Height=0.23mm, Package Length=0.6mm, Package Shape=Rectangular, Package Style=SMTMeter, Package Width=0.3mm, Power=50mW, Rated Temperature=70°C, Resistor Type="FIXED RESISTOR", Supplier Part Number=541-CRCW02015K11FNEDCT-ND, Temperature Coefficient=200ppm/°C, Tolerance=1%, Working Voltage=30V, Category="Chip SMD Resistors", ComponentLink1Description=https://datasheet.ciiva.com:443/pdfs/VipMasterIC/IC/VISH/VISH-S-A0002932828/VISH-S-A0002932828-1.pdf?src-supplier=IHS+Markit, ComponentLink1URL=https://datasheet.ciiva.com:443/pdfs/VipMasterIC/IC/VISH/VISH-S-A0002932828/VISH-S-A0002932828-1.pdf?src-supplier=IHS+Markit, ComponentLink2Description=https://datasheet.ciiva.com/2577/crcw0201e3-2577232.pdf?src-supplier=Digikey, ComponentLink2URL=https://datasheet.ciiva.com/2577/crcw0201e3-2577232.pdf?src-supplier=Digikey, ComponentLink3Description=https://datasheet.ciiva.com/9067/crcw0201e3-9067501.pdf?src-supplier=Avnet, ComponentLink3URL=https://datasheet.ciiva.com/9067/crcw0201e3-9067501.pdf?src-supplier=Avnet, ComponentLink4Description=https://datasheet.ciiva.com/22707/1719906-22707711.pdf?src-supplier=Element14, ComponentLink4URL=https://datasheet.ciiva.com/22707/1719906-22707711.pdf?src-supplier=Element14, ComponentLink5Description=https://datasheet.ciiva.com/7690/1719906-7690629.pdf?src-supplier=Element14, ComponentLink5URL=https://datasheet.ciiva.com/7690/1719906-7690629.pdf?src-supplier=Element14, Construction=Chip, JESD-609 Code=e3, Manufacturer Part Number=CRCW02015K11FNED, Mounting Technology="Surface Mount", Packaging="Tape and Reel", Pins=2, Pricing="1=0,1, 10=0,037, 50=0,0242, 100=0,0204, 500=0,01426, 1000=0,01241, 5000=0,00924 (USD)", Reach SVHC Compliant=Yes, Reference Standard=AEC-Q200, RoHS=Yes, RoHS Compliant=Yes, Stock=23740, Supplier=Digikey, Supplier 1=Digikey, Supplier Part Number 1=541-CRCW02015K11FNEDCT-ND, Technology="METAL GLAZE/THICK FILM", Terminal Finish=Nickel, Termination=Wraparound
R1500 R1501: "Fixed Resistor, Metal Glaze/thick Film, 0.2W, 499ohm, 50V, 1% +/-Tol, 100ppm/Cel, Surface Mount, 0402", Case/Package=0402, Manufacturer="Vishay Dale", Manufacturer Series=CRCW-HPE3, Max Operating Temperature=155°C, Medical Grade MFR=TBD, Min Operating Temperature=-55°C, Package Height=0.3mm, Package Length=1mm, Package Shape=Rectangular, Package Style=SMTMeter, Package Width=0.5mm, Power=200mW, Rated Temperature=70°C, Resistor Type="FIXED RESISTOR", Supplier Part Number=541-499YCT-ND, Supplier Part Number 1=71-CRCW0402499RFKEDH, Temperature Coefficient=100ppm/°C, Tolerance=1%, Working Voltage=50V, Category="Chip SMD Resistors", ComponentLink1Description=https://datasheet.ciiva.com:443/pdfs/VipMasterIC/IC/VISH/VISH-S-A0009391795/VISH-S-A0009391795-1.pdf?src-supplier=IHS+Markit, ComponentLink1URL=https://datasheet.ciiva.com:443/pdfs/VipMasterIC/IC/VISH/VISH-S-A0009391795/VISH-S-A0009391795-1.pdf?src-supplier=IHS+Markit, ComponentLink2Description=https://datasheet.ciiva.com/5540/crcwhpe3-46056-5540816.pdf?src-supplier=Mouser, ComponentLink2URL=https://datasheet.ciiva.com/5540/crcwhpe3-46056-5540816.pdf?src-supplier=Mouser, ComponentLink3Description=https://datasheet.ciiva.com/8932/crcwhpe3-8932421.pdf?src-supplier=Avnet, ComponentLink3URL=https://datasheet.ciiva.com/8932/crcwhpe3-8932421.pdf?src-supplier=Avnet, Construction=Chip, JESD-609 Code=e3, Manufacturer Part Number=CRCW0402499RFKEDHP, Medical Grade MFR PN=TBD, Mounting Technology="Surface Mount", Packaging="Tape and Reel", Pins=2, Pricing="1=0.13, 10=0.061, 50=0.0402, 100=0.0341, 500=0.024, 1000=0.02091, 5000=0.01572 (USD)", Reach SVHC Compliant=Yes, Reference Standard=AEC-Q200, RoHS=Yes, RoHS Compliant=Yes, Series="CRCW-HP E3", Stock=50100, Supplier=Digikey, Supplier 1=Mouser, Technology="METAL GLAZE/THICK FILM", Terminal Finish=Nickel, Termination=Wraparound
SW700: "Pushbutton, NO-MOM, 12V, 0.05A, SMT", Manufacturer=C&K, Package Description=SMT, Rating=12V,0.05A, Supplier Part Number 1=PTS647SN50SMTR2LFSCT-ND, Category=Pushbutton, Length (mm)="6.5 ±0.20", Manufacturer Part Number=PTS647SN50SMTR2LFS, Supplier 1=Digi-Key, Thickness (mm)="1.55 ±0.15", Width (mm)=4.5
TP300 TP301 TP302 TP303 TP304 TP305 TP400 TP401 TP402 TP403 TP404 TP405 TP406 TP500 TP501 TP502 TP503 TP504 TP505 TP506 TP507 TP508 TP509 TP510 TP511 TP512 TP513 TP514 TP515 TP600 TP601 TP602 TP603 TP604 TP605 TP606 TP607 TP608 TP609 TP610 TP611 TP612 TP613 TP614 TP615 TP616 TP617 TP618 TP619 TP620 TP621 TP622 TP623 TP624 TP625 TP626 TP627 TP628 TP629 TP630 TP631 TP632 TP633 TP634 TP635 TP700 TP701 TP702 TP703 TP704 TP705 TP706 TP707 TP708 TP709 TP710 TP711 TP712 TP713 TP714 TP800 TP801 TP802 TP803 TP900 TP901 TP902 TP903 TP904 TP905 TP906 TP907 TP908 TP909 TP910 TP1000 TP1001 TP1003 TP1004 TP1005 TP1006 TP1007 TP1008 TP1009 TP1010 TP1011 TP1012 TP1013 TP1014 TP1015 TP1016 TP1017 TP1018 TP1019 TP1020 TP1021 TP1100 TP1101 TP1104 TP1105 TP1107 TP1108 TP1109 TP1110 TP1111 TP1112 TP1113 TP1114 TP1115 TP1300 TP1301 TP1302 TP1402 TP1405 TP1406 TP1500 TP1501 TP1502: "Test pad, 0.90mm circular pad", Manufacturer=N/A, Category="Test point", Length (mm)=0.90, Manufacturer PN=N/A, Medical Grade MFR=N/A, Medical Grade MFR PN=N/A, PCB Footprint=testpad_0p90mm, Rating=N/A, Thickness (mm)=N/A, Width (mm)=0.90
U300: "FRAM, 8 Mbit (1024k x 8), SPI, 1.8-3.6V, QFN-8", Manufacturer="Cypress Semiconductor", Medical Grade MFR=TBD, Rating=3.6V, Category=IC, Length (mm)="3.28 ±0.05", Manufacturer Part Number=CY15B108QN-20LPXC, Medical Grade MFR PN=TBD, Package Description=TBD, PCB Footprint=TBD, Supplier 1=Heisener, Supplier Part Number 1=CY15B108QN-20LPXC, Thickness (mm)="0.50 ±0.05", Width (mm)="3.23 ±0.05"
U301: "Microcontroller, ARM Cortex-M33, 2.0 MB Flash, 786 kB RAM, BGA-132 pins with dedicated pinout supporting SMPS step-down converter", Manufacturer=STMicro, Medical Grade MFR=TBD, Supplier Part Number 1=511-STM32U585QII6Q, Category=IC, Length (mm)="7.00 ±0.15", Manufacturer Part Number=STM32U585QII6Q, Medical Grade MFR PN=TBD, Package Description=TBD, PCB Footprint=TBD, Rating=TBD, Supplier 1=Mouser, Thickness (mm)=0.60, Width (mm)="7.00 ±0.15"
U400: "Bluetooth radio, v5.0, 192 kB Flash, 24 kB RAM, BGA-33", Manufacturer=Nordic, Medical Grade MFR=TBD, Supplier Part Number 1=4823-NRF52810-CAAA-E-R7CT-ND, Category=IC, Length (mm)=2.48, Manufacturer Part Number=NRF52810-CAAA-E-R7, Medical Grade MFR PN=TBD, Package Description=TBD, PCB Footprint=TBD, Rating=TBD, Supplier 1=DigiKey, Thickness (mm)="0.48 ±0.06", Width (mm)=2.46
U500 U501 U503 U504 U604 U605 U903: "Op Amp, Rail-to-Rail, 95kHz, WLCSP-6", Manufacturer="Analog Devices", Medical Grade MFR=TBD, Rating=5.5V, Supplier Part Number 1=AD8505ACBZ-R7CT-ND, Category=IC, Length (mm)="1.39 ±0.04", Manufacturer Part Number=AD8505ACBZ-R7, Medical Grade MFR PN=TBD, Package Description=TBD, PCB Footprint=TBD, Supplier 1=Digi-Key, Thickness (mm)="0.56 ±0.05", Width (mm)="0.90 ±0.04"
U502: "Buck-Boost Converter, Selectable Voltage, QFN-20", Manufacturer="Analog Devices", Medical Grade MFR=TBD, Rating=25V, Supplier Part Number 1=LTC3130IUDC-1#PBF-ND, Category=IC, Length (mm)="4.00 ±0.10", Manufacturer Part Number=LTC3130IUDC-1#PBF, Medical Grade MFR PN=TBD, PackageDescription=TBD, PCB Footprint=TBD, Supplier 1=Digi-Key, Thickness (mm)="0.75 ±0.05", Width (mm)="3.00 ±0.10"
U505 U507 U608 U609 U706 U707 U708 U905 U906: "MOSFET N/P-CH 30V 0.22A SOT963", Manufacturer="Diodes inc.", Package=SOT-963, Power Dissipation=350mW, Supplier Part Number 1=DMC31D5UDJ-7DICT-ND, Category=Transistors, Cin=22.6pF, Id(Max)=-200mA, Manufacturer Part Number=DMC31D5UDJ-7, Number of Channels=2, RoHS="RoHS 2", Ron(Max)=4.5Ohm, Supplier 1=Digikey, Type="MOSFET array", Vds(Max)=30V, Vgs(Max)=±12V, Vth(Max)=-1.0V
U506 U508 U607 U610 U611 U613 U615 U802 U1301 U1502 U1503 U1504 U1505 U1506 U1507: "MOSFET 2N-CH 30V 0.22A SOT963", Manufacturer="Diodes inc.", Package=SOT-963, Power Dissipation=350mW, Supplier Part Number 1=31-DMN31D5UDJ-7CT-ND, Category=Transistors, Cin=22.6pF, Id(Max)=220mA, Manufacturer Part Number=DMN31D5UDJ-7, Number of Channels=2, RoHS="RoHS 2", Ron(Max)=4.5Ohm, Supplier 1=Digikey, Type="MOSFET array", Vds(Max)=30V, Vgs(Max)=±12V, Vth(Max)=1.0V
U600 U602: "Charge Controller, 4.2V, 250mA, DFN-6", Alt Manufacturer=-, Manufacturer="Linear Technology", Medical Grade MFR=TBD, Rating=250mA, Supplier Part Number 1=505-LTC4065LEDC#TRPBFCT-ND, Alt Manufacturer PN=-, Category=IC, Datasheet=https://datasheet.ciiva.com/pdfs/VipMasterIC/IC/ANDI/ANDI-S-A0006647666/ANDI-S-A0006647666-1.pdf?src-supplier=IHS+Markit, Length (mm)="2.00 ±0.10", Manufacturer Part Number=LTC4065LEDC#TRPBF, Medical Grade MFR PN=TBD, PCB Footprint=TBD, Supplier 1=Digi-Key, Supplier Link=https://www.analog.com/en/products/ltc4065l.html, Thickness (mm)="0.75 ±0.05", Width (mm)="2.00 ±0.10"
U601 U603: "Comparator, 1.2V Reference, Open-drain, BGA-4", Manufacturer="Texas Instruments", Medical Grade MFR=TBD, Supplier Part Number 1=296-TLV4021R1YKARCT-ND, Category=IC, Length (mm)="0.73 ±0.03", Manufacturer Part Number=TLV4021R1YKAR, Medical Grade MFR PN=TBD, Package Description=TBD, PCB Footprint=TBD, Rating=TBD, Supplier 1=Digi-Key, Thickness (mm)=0.40
U606 U612 U614 U616 U801: "MOSFET 2P-CH 20V 0.36A SOT963", Manufacturer="Diodes inc.", Package=SOT-963, Power Dissipation=380mW, Supplier Part Number 1=31-DMP22D5UDJ-7DKR-ND, Category=Transistors, Cin=17pF, Id(Max)=-360mA, Manufacturer Part Number=DMP22D5UDJ-7, Number of Channels=2, RoHS="RoHS 2", Ron(Max)=5Ohm, Supplier 1=Digikey, Type="MOSFET array", Vds(Max)=-20V, Vgs(Max)=±8V, Vth(Max)=-1.0V
U700 U702 U704: "LDO Regulator, 3.3V, Shutdown, DFN1010-4", Manufacturer="Diodes Inc", Medical Grade MFR=TBD, Rating=3.3V, Supplier Part Number 1=AP7354D-33FS4-7DICT-ND, Category=IC, Length (mm)="1.00 ±0.05", Manufacturer Part Number=AP7354D-33FS4-7, Medical Grade MFR PN=TBD, Package Description=TBD, PCB Footprint=TBD, Supplier 1=Digi-Key, Supplier Link=https://octopart.com/search?q=AP7354D-33FS4-7&filter%5Bfields%5D%5Bbrand.name%5D%5B%5D=Diodes+Inc.4-7, Thickness (mm)="0.39 ±0.01", Width (mm)="1.00 ±0.05"
U701: "Boost, SEPIC Switching Regulator IC Positive Adjustable 1.23V 1 Output 75mA (Switch) SOT-23-5", Manufacturer="Linear Technology", Medical Grade MFR=TBD, Rating="100 mA", Supplier Part Number 1=505-LT1615ES5-1#TRPBFCT-ND, Category=IC, Length (mm)="2.80 ±0.20", Manufacturer Part Number=LT1615ES5-1#TRPBF, Medical Grade MFR PN=TBD, Package Description=TBD, PCB Footprint=TBD, Supplier 1=Digi-Key, Thickness (mm)=1.00, Width (mm)="2.95 ±0.15"
U703: "Digital potentiometer, 256 taps, 100k, I2C, QFN-10", Manufacturer=Renesas, Medical Grade MFR=TBD, Supplier Part Number 1=ISL23315TFRUZ-T7ACT-ND, Category=IC, Length (mm)=2.10, Manufacturer Part Number=ISL23315TFRUZ-T7A, Medical Grade MFR PN=TBD, Package Description=TBD, PCB Footprint=TBD, Rating=TBD, Supplier 1=Digi-Key, Thickness (mm)=0.55, Width (mm)=1.60
U705: "Reset Monitor, 2.63V, Active low, X2SON", Manufacturer="Texas Instruments", Medical Grade MFR=TBD, Rating=N/A, Supplier Part Number 1=296-40754-1-ND, Category=IC, Length (mm)="1.00 ±0.05", Manufacturer Part Number=TPS3831L30DQNR, Medical Grade MFR PN=TBD, Package Description=TBD, PCB Footprint=TBD, Supplier 1=Digi-Key, Thickness (mm)=0.40, Width (mm)="1.00 ±0.05"
U709 U710: "OR Controller Source Selector Switch P-Channel 1:1 4-WLP (0.73x0.73)", Current - Output (Max)=1.2A, Manufacturer="Maxim Integrated", Supplier Part Number 1=MAX40200ANS+TCT-ND, Voltage - Supply="1.5V ~ 5.5V", Manufacturer Part Number=MAX40200ANS+T, Mounting Type=SMD, Supplier 1=Digikey
U800: "Magnet Sensor, 15 Gauss, ULLGA4, Implant-grade", Manufacturer=NVE, Medical Grade MFR PN=BD020-14E, Package Description=TBD, Rating=N/A, Supplier Part Number 1=391-ADL021-14ECT-ND, Category=IC, Length (mm)=1.10, Manufacturer Part Number=ADL021-14E, Medical Grade MFR=NVE, PCB Footprint=TBD, Supplier 1=Digi-Key, Thickness (mm)=0.40, Width (mm)=1.10
U900: "2 Circuit IC Switch 4:1 78Ohm 16-miniQFN (1.8x2.6)", Manufacturer Name=Vishay, Supplier Part Number 1=78-DG4052EEN-T1-GE4, Category=IC, Height=0.6mm, Manufacturer Part Number=DG4052EEN-T1-GE4, Supplier 1=Mouser, Supplier 2=Digikey, Supplier 3=Digikey, Supplier 4=Digikey, Supplier Part Number 2=DG4052EEN-T1-GE4CT-ND, Supplier Part Number 3=DG4052EEN-T1-GE4DKR-ND, Supplier Part Number 4=DG4052EEN-T1-GE4TR-ND, Type=Switch
U901: "2 Circuit IC Switch 4:1 78Ohm 16-miniQFN (1.8x2.6)", Manufacturer Name=Vishay, Supplier Part Number 1=78-DG4053EEN-T1-GE4, Category=IC, Height=0.6mm, Manufacturer Part Number=DG4053EEN-T1-GE4, Supplier 1=Mouser, Supplier 2=Digikey, Supplier 3=Digikey, Supplier 4=Digikey, Supplier Part Number 2=DG4053EEN-T1-GE4CT-ND, Supplier Part Number 3=DG4053EEN-T1-GE4DKR-ND, Supplier Part Number 4=DG4053EEN-T1-GE4TR-ND, Type=Switch
U902: library part TLV9002SIYCKR_B, "Op Amp, Dual, Rail-to-Rail, 1MHz, BGA-9", Manufacturer="Texas Instruments", Medical Grade MFR=TBD, Rating=5.5V, Supplier Part Number 1=595-TLV9002SIYCKR, Category=IC, Length (mm)="0.95 ±0.03", Manufacturer Part Number=TLV9002SIYCKR, Medical Grade MFR PN=TBD, Package Description=TBD, PCB Footprint=TBD, Supplier 1=Mouser, Thickness (mm)=0.33, Width (mm)="0.95 ±0.03"
U904: "Differential Amplifier, 110 MHz, DFN-8", Manufacturer="Analog Devices", Medical Grade MFR=TBD, Supplier Part Number 1=505-AD8137YCPZ-REEL7CT-ND, Category=IC, Length (mm)="3.00 ±0.10", Manufacturer Part Number=AD8137YCPZ-REEL7, Medical Grade MFR PN=TBD, Package Description=TBD, PCB Footprint=TBD, Rating=TBD, Supplier 1=Digi-Key, Thickness (mm)="0.75 ±0.05", Width (mm)="3.00 ±0.10"
U1000 U1002: "Analog Circuit, 1 Func, 1 Channel", Case/Package=HVQCCN, Current supply=170uA, Manufacturer="Analog Devices", Max Operating Temperature=85°C, Max Supply Voltage=3.5V, Min Operating Temperature=-40°C, Min Supply Voltage=2V, Nominal Supply Voltage=3V, Package Shape=Square, Package Style="CHIP CARRIER, HEAT SINK/SLUG, VERY THIN PROFILEMeter", Supplier Part Number=584-AD8232ACPZ-R7, Temperature Grade=INDUSTRIAL, Voltage supply=2-3.5V, Bandwidth=2kHz, Category="Amplifiers - Op Amps, Buffer, Instrumentation", Channels=1, CMRR=80dB, ComponentLink1Description=https://datasheet.ciiva.com:443/pdfs/VipMasterIC/IC/ANDI/ANDI-S-A0005264682/ANDI-S-A0005264682-1.pdf?src-supplier=IHS+Markit, ComponentLink1URL=https://datasheet.ciiva.com:443/pdfs/VipMasterIC/IC/ANDI/ANDI-S-A0005264682/ANDI-S-A0005264682-1.pdf?src-supplier=IHS+Markit, ComponentLink2Description=https://datasheet.ciiva.com/6579/ad8232-6579751.pdf?src-supplier=Digi-Key, ComponentLink2URL=https://datasheet.ciiva.com/6579/ad8232-6579751.pdf?src-supplier=Digi-Key, ComponentLink3Description=https://datasheet.ciiva.com/6579/ad8232-6579754.pdf?src-supplier=Digi-Key, ComponentLink3URL=https://datasheet.ciiva.com/6579/ad8232-6579754.pdf?src-supplier=Digi-Key, ComponentLink4Description=https://datasheet.ciiva.com/6579/ad8232-6579770.pdf?src-supplier=Digi-Key, ComponentLink4URL=https://datasheet.ciiva.com/6579/ad8232-6579770.pdf?src-supplier=Digi-Key, Gain=100V/V, Height - Seated (Max)=0.8mm, JESD-30 Code=S-XQCC-N20, Length=4mm, Manufacturer Part Number=AD8232ACPZ-R7, Pins=20, Pricing="1=4,71, 10=4,07, 50=4,07, 100=3,57, 1000=2,53, 10000=2,37 (USD)", Reach SVHC Compliant=Yes, RoHS=Yes, RoHS Compliant=Yes, Stock=3930, Supplier=Mouser, Supplier 1=Mouser, Supplier Part Number 1=584-AD8232ACPZ-R7, Surface Mount=Yes, Terminal Form="No Lead", Terminal Pitch=0.5mm, Terminal Position=QUAD, Throw Configuration="ANALOG CIRCUIT", Width=4mm
U1001 U1003: "Analog front end, ECG, RLD amp, BGA-20", Current supply=50uA, Manufacturer="Analog Devices", Medical Grade MFR=TBD, Supplier Part Number 1=505-AD8233ACBZ-R7CT-ND, Voltage supply=1.7-3.5V, Bandwidth=1kHz, Category=IC, CMRR=86dB, Gain=40dB, Length (mm)="2.04 ±0.04", Manufacturer Part Number=AD8233ACBZ-R7, Medical Grade MFR PN=TBD, Package Description=TBD, PCB Footprint=TBD, Rating=TBD, Supplier 1=Digi-Key, Thickness (mm)="0.50 ±0.06", Width (mm)="1.71 ±0.04"
U1100: "Monostable, RC set, dual triggers, BGA-8", Manufacturer="Texas Instruments", Medical Grade MFR=TBD, Supplier Part Number 1=296-21058-1-ND, Category=IC, Length (mm)="1.89 ±0.03", Manufacturer Part Number=SN74LVC1G123YZPR, Medical Grade MFR PN=TBD, Package Description=TBD, PCB Footprint=TBD, Rating=TBD, Supplier 1=Digi-Key, Thickness (mm)=0.50, Width (mm)="0.89 ±0.03"
U1101: "AND gate, Dual 2-input, BGA-8", Manufacturer="Texas Instruments", Medical Grade MFR=TBD, Supplier Part Number 1=296-14371-1-ND, Category=IC, Length (mm)="1.89 ±0.03", Manufacturer Part Number=SN74LVC2G08YZPR, Medical Grade MFR PN=TBD, Package Description=TBD, PCB Footprint=TBD, Rating=TBD, Supplier 1=Digi-Key, Thickness (mm)=0.50, Width (mm)="0.89 ±0.03"
U1102: "DAC, 16-bit, Dual channel, SPI/I2C, WSON-10", Manufacturer="Texas Instruments", Medical Grade MFR=N/A, Rating=2.7-5.5V, Supplier Part Number 1=296-DAC80502DRXTCT-ND, Category=IC, Length (mm)="2.50 ±0.10", Manufacturer Part Number=DAC80502DRXT, Medical Grade MFR PN=N/A, Package Description=N/A, PCB Footprint=N/A, Supplier 1=Digi-Key, Thickness (mm)="0.75 ±0.05", Width (mm)="2.50 ±0.10"
U1103 U1104 U1300: "Analog Switch, SPDT, 2:1, DSBGA6", Manufacturer="Texas Instruments", Medical Grade MFR=TBD, Rating=5.0V, Supplier Part Number 1=296-18671-1-ND, Category=IC, Length (mm)="1.39 ±0.03", Manufacturer Part Number=TS5A3159AYZPR, Medical Grade MFR PN=TBD, Package Description=TBD, PCB Footprint=TBD, Supplier 1=Digi-Key, Thickness (mm)="0.50 ±0.10", Width (mm)="0.89 ±0.03"
U1105: "Op Amp, Dual, Rail-to-Rail, 1MHz, BGA-9", Manufacturer="Texas Instruments", Medical Grade MFR=TBD, Rating=5.5V, Supplier Part Number 1=296-TLV9002SIYCKRCT-ND, Category=IC, Length (mm)="0.95 ±0.03", Manufacturer Part Number=TLV9002SIYCKR, Medical Grade MFR PN=TBD, Package Description=TBD, PCB Footprint=TBD, Supplier 1=Digi-Key, Thickness (mm)=0.33, Width (mm)="0.95 ±0.03"
U1106: "OR Gate IC 1 Channel 6-XSON, SOT1202 (1x1)", Manufacturer=Nexperia, Operating Supply Current="4 uA", Supplier Part Number=TBD, Supplier Part Number 1=771-74LVC1G32GS132, Category="Logic Gate", Height=0.46, Manufacturer Part Number=74LVC1G32GS,132, Mounting Type=SMD, Shutdown Capabilities=No, Supplier=TBD, Supplier 1=Mouser, Supplier 2=Digikey, Supplier 3=Digikey, Supplier 4=Digikey, Supplier Part Number 2=1727-74LVC1G32GS,132CT-ND, Supplier Part Number 3=1727-74LVC1G32GS,132DKR-ND, Supplier Part Number 4=1727-74LVC1G32GS,132TR-ND, Type=OR
U1400: "IC USB TO SERIAL BRIDGE 32QFN", Manufacturer=Infineon, Package=32-QFN, Supplier Part Number 1=CY7C65215-32LTXI-ND, Category=ICs, Manufacturer Part Number=CY7C65215-32LTXI, RoHS=Yes, Supplier 1=Digikey, Type="USB to Serial Bridge"
U1401 U1402: "Fixed Positive LDO Regulator, 3.7V, 0.375V Dropout, PDSO6", Case/Package=VSON, Manufacturer="Texas Instruments", Max Supply Voltage=5.5V, Min Input Voltage=2V, Operating Temperature, TJ-Max=125°C, Operating Temperature, TJ-Min=-40°C, Output Current1-Max=300mA, Output Voltage1-Max=3.774V, Output Voltage1-Min=3.626V, Output Voltage1-Nom=3.7V, Package Body Material=Plastic, Package Shape=Square, Package Style="SMALL OUTLINE, VERY THIN PROFILEMeter", Peak Reflow Temperature (Cel)=260°C, Supplier Part Number=296-TLV70237DSETCT-ND, Category="Voltage Regulators - Linear", Channels=1, ComponentLink1Description=https://www.ti.com:443/lit/ds/symlink/tlv702.pdf?src-supplier=IHS+Markit, ComponentLink1URL=https://www.ti.com:443/lit/ds/symlink/tlv702.pdf?src-supplier=IHS+Markit, ComponentLink2Description=http://www.ti.com/lit/ds/symlink/tlv702.pdf?src-supplier=Digi-Key, ComponentLink2URL=http://www.ti.com/lit/ds/symlink/tlv702.pdf?src-supplier=Digi-Key, ComponentLink3Description=http://www.ti.com/lit/ds/symlink/tlv70237.pdf?src-supplier=Avnet, ComponentLink3URL=http://www.ti.com/lit/ds/symlink/tlv70237.pdf?src-supplier=Avnet, Height - Seated (Max)=0.8mm, JESD-30 Code=S-PDSO-N6, JESD-609 Code=e4, Length=1.5mm, Manufacturer Part Number=TLV70237DSET, Moisture Sensitivity Level=1, Pins=6, Pricing="1=1,11, 10=0,992, 25=0,9416, 100=0,7736 (USD)", Reach SVHC Compliant=Yes, Regulator Type="FIXED POSITIVE SINGLE OUTPUT LDO REGULATOR", RoHS=Yes, RoHS Compliant=Yes, Stock=1935, Supplier=Digi-Key, Supplier 1=Digi-Key, Supplier Part Number 1=296-TLV70237DSETCT-ND, Surface Mount=Yes, Terminal Finish=Nickel, Terminal Form="No Lead", Terminal Pitch=0.5mm, Terminal Position=DUAL, Width=1.5mm
U1500 U1501: "IC SWITCH SPDTX4 4.5OHM 20LFCSP", Manufacturer="Analog Devices", Medical Grade MFR=N/A, Package Description=TBD, Supplier Part Number 1=505-ADG1634BCPZ-REEL7CT-ND, Category=IC, Length (mm)="4.00 ±0.10", Manufacturer Part Number=ADG1634BCPZ-REEL7, Medical Grade MFR PN=N/A, PCB Footprint=TBD, Rating=TBD, Supplier 1=Digi-Key, Thickness (mm)="0.75 ±0.05", Width (mm)="4.00 ±0.10"
X100 X101 X102 X103 X104 X105: "FIDUCIAL_MARK", Manufacturer PN=FIDUCIAL
X106 X107 X108: library part HOLE_UNPLATED, "Hole, Unplated"